# Altium PCB 宁波2号线PIS_数字功率放大器_网络音频(BHC-A-2030-02)_PCB(06001537)_V1.0.PcbDoc (part 6 of 7)
Units mm, origin at the board's own origin, x right, y up, seen from the top; angles counter-clockwise.
Board outline 86 x 96 mm, 4 copper layers (Top Layer, GND, VDD, Bottom Layer); 204 components, 185 nets, 781 pads, 267 vias.
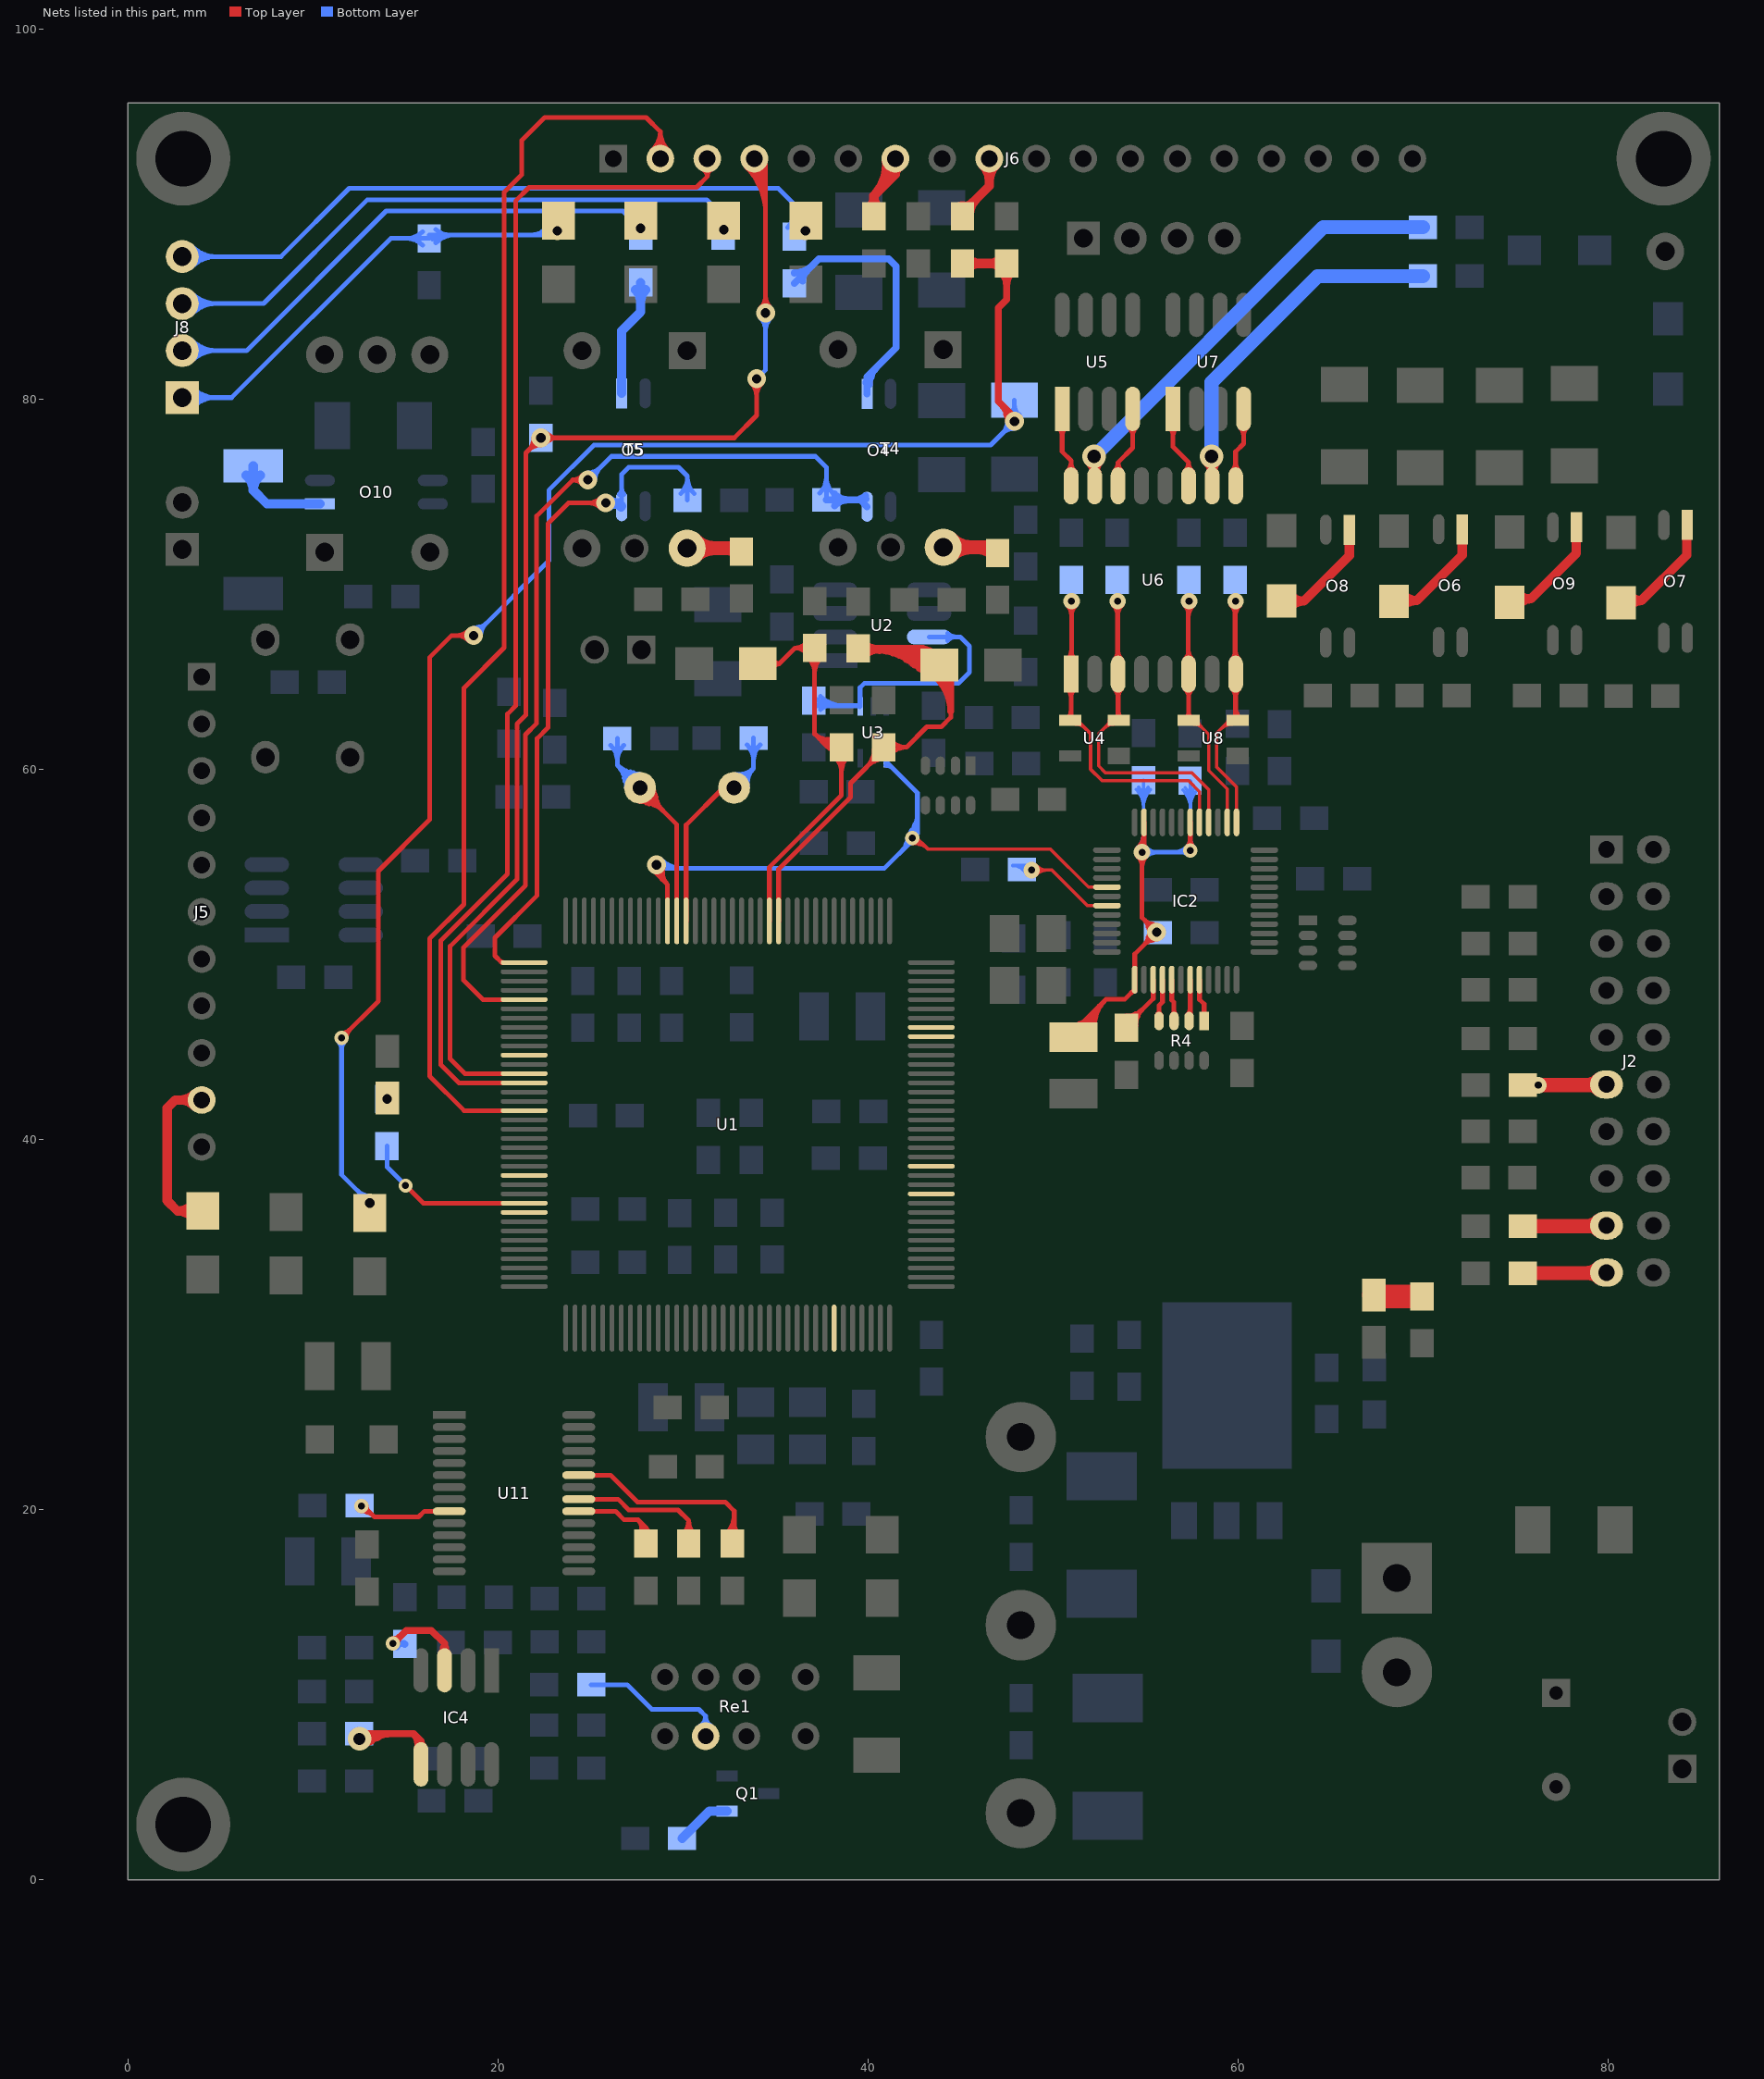
[diagram p8: the nets of this part, all layers, seen from the top]

## Via types
v1: diameter 1.016, hole 0.508, Top Layer to Bottom Layer, 122 vias
v2: diameter 0.762, hole 0.381, Top Layer to Bottom Layer, 48 vias
v3: diameter 0.889, hole 0.381, Top Layer to Bottom Layer, 37 vias
v4: diameter 1.27, hole 0.635, Top Layer to Bottom Layer, 28 vias
v5: diameter 1.27, hole 0.711, Top Layer to Bottom Layer, 20 vias
v6: diameter 0.762, hole 0.457, Top Layer to Bottom Layer, 11 vias
v7: diameter 1.143, hole 0.635, Top Layer to Bottom Layer, 1 vias

## Nets (pads, with @x,y where several pads share a name; then routed paths per layer and width w, separated by ;. In a path a pad name is that pad's centre, name@x,y a point inside that pad or via, vN(x,y) a via of type N, cw(c..) or ccw(c..) an arc to the next point about the centre after c; other vN are vias at no path point) (continued)
NetIC2_31: IC2.31 R20.1 | length 12.8
  Top Layer w0.178: v3(48.844,54.559) 49.936,54.559 51.856,52.64 IC2.31@52.917,52.64 ; 49.703,54.559 cw(c49.703,55.418) 49.096,54.811 ccw(c49.703,55.418) 49.703,54.559 ; 49.703,54.559 ccw(c49.703,53.701) 49.096,54.308 cw(c49.703,53.701) 49.703,54.559
  Bottom Layer w0.178: R20.1@47.82,54.804 cw(c47.82,53.985) 48.534,54.385 ccw(c47.82,53.985) R20.1@47.82,54.804 ; R20.1@47.82,54.804 48.6,54.804 v3(48.844,54.559) ; v3(48.844,54.559) ccw(c48.427,54.325) 48.427,54.804 cw(c48.427,54.325) v3(48.844,54.559) ; R20.1@48.123,54.804 cw(c48.123,54.155) 48.689,54.472 ccw(c48.123,54.155) R20.1@48.123,54.804
NetIC2_39: IC2.39 R8.2 | length 8.9
  Top Layer w0.254: 54.598,46.839 ccw(c54.828,45.983) R8.2@53.959,46.16 ; 54.639,46.801 cw(c53.78,47.031) R8.2@53.959,46.16 ; IC2.39@55.417,48.64 55.417,47.619 R8.2@53.959,46.161 ; R8.2@53.959,46.668 ccw(c53.959,47.892) 54.824,47.026 cw(c53.959,47.892) R8.2@53.959,46.668 ; R8.2@54.467,46.16 cw(c55.696,46.16) 54.827,47.029 ccw(c55.696,46.16) R8.2@54.467,46.16
NetIC2_40: IC2.40 R4.4 | length 3.3
  Top Layer w0.254: R4.4@55.728,46.406 55.728,47.244 55.917,47.434 IC2.40@55.917,48.64 ; 55.728,46.958 cw(c55.421,46.958) 55.638,46.742 ccw(c55.421,46.958) 55.728,46.958 ; 55.728,46.958 ccw(c56.034,46.958) 55.817,46.742 cw(c56.034,46.958) 55.728,46.958
NetIC2_41: IC2.41 R4.3 | length 3.2
  Top Layer w0.254: IC2.41@56.417,48.64 56.417,47.545 56.54,47.422 R4.3@56.54,46.406 ; 56.54,46.958 cw(c56.234,46.958) 56.451,46.742 ccw(c56.234,46.958) 56.54,46.958 ; 56.54,46.958 ccw(c56.847,46.958) 56.63,46.742 cw(c56.847,46.958) 56.54,46.958
NetIC2_43: IC2.43 R4.2 | length 3.1
  Top Layer w0.254: R4.2@57.353,46.406 57.417,46.47 IC2.43@57.417,48.64 ; R4.2@57.263,46.742 ccw(c56.892,47.113) 57.417,47.113 cw(c56.892,47.113) R4.2@57.263,46.742
NetIC2_44: IC2.44 R4.1 | length 3.3
  Top Layer w0.254: IC2.44@57.917,48.64 57.917,47.569 58.166,47.32 R4.1@58.166,46.406 ; 58.166,46.958 cw(c57.859,46.958) 58.076,46.742 ccw(c57.859,46.958) 58.166,46.958 ; 58.166,46.958 ccw(c58.473,46.958) 58.256,46.742 cw(c58.473,46.958) 58.166,46.958
NetIC4_3: IC4.3 R76.2 | length 12.3
  Top Layer w0.381: v2(14.326,12.776) 14.351,12.776 15.062,13.487 16.408,13.487 17.12,12.776 17.12,12.548 ; 17.12,12.548 cw(c16.805,12.548) 16.994,12.296 ccw(c16.805,12.548) 17.12,12.548 ; 17.12,12.548 ccw(c17.434,12.548) 17.245,12.296 cw(c17.434,12.548) 17.12,12.548 ; 17.12,12.634 cw(c16.614,12.634) 16.971,12.277 ccw(c16.614,12.634) 17.12,12.634 ; 17.12,12.634 ccw(c17.625,12.634) 17.268,12.277 cw(c17.625,12.634) 17.12,12.634 ; v2@14.326,12.967 ccw(c14.326,13.488) 14.694,13.119 cw(c14.326,13.488) v2@14.326,12.967 ; v2@14.516,12.776 cw(c14.915,12.776) 14.633,13.058 ccw(c14.915,12.776) v2@14.516,12.776
  Top Layer w0.508: IC4.3@17.12,11.328 17.12,12.548
  Bottom Layer w0.381: R76.2@14.97,12.743 14.936,12.776 v2(14.326,12.776) ; v2(14.326,12.776) cw(c14.326,12.547) 14.545,12.614 ccw(c14.326,12.547) v2(14.326,12.776) ; v2(14.326,12.776) ccw(c14.326,13.042) 14.567,12.93 cw(c14.326,13.042) v2(14.326,12.776) ; R76.2@14.786,12.776 cw(c14.786,13.236) 14.46,12.911 ccw(c14.786,13.236) R76.2@14.786,12.776 ; R76.2@14.786,12.776 ccw(c14.786,12.316) 14.46,12.641 cw(c14.786,12.316) R76.2@14.786,12.776
NetIC4_5: IC4.5 R105.2 | length 14.1
  Top Layer w0.381: v4@12.576,7.654 ccw(c12.958,7.9) 13.184,7.507 ; v4@12.896,7.86 ccw(c13.294,8.116) 13.531,7.706 ; v4@12.929,7.899 15.443,7.899 ; IC4.5@15.85,6.248 15.85,7.493 ; 15.443,7.899 cw(c14.873,7.329) 15.648,7.106 ccw(c14.873,7.329) 15.443,7.899 ; 15.443,7.899 15.85,7.493 ; 15.85,7.493 cw(c15.483,7.493) 15.716,7.21 ccw(c15.483,7.493) 15.85,7.493 ; 15.85,7.493 ccw(c16.217,7.493) 15.983,7.21 cw(c16.217,7.493) 15.85,7.493 ; v4@12.567,7.575 cw(c13.35,6.792) 13.35,7.899 ccw(c13.35,6.792) v4@12.567,7.575 ; v4@12.837,7.306 cw(c14.27,5.872) 14.27,7.899 ccw(c14.27,5.872) v4@12.837,7.306
  Bottom Layer w0.381: R105.2@12.514,7.899 R105.2@12.929,7.899
  other v4: 12.522,7.62
NetJ2_11: J2.11 R30.2 | length 7.4
  Top Layer w0.762: R30.2@75.379,42.946 79.877,42.946 J2.11@79.908,42.977 ; 78.786,42.946 ccw(c78.786,43.972) 79.512,43.246 cw(c78.786,43.972) 78.786,42.946 ; 78.937,42.946 cw(c78.937,42.132) 79.512,42.707 ccw(c78.937,42.132) 78.937,42.946
  other v3: 76.225,42.936
NetJ2_17: J2.17 R31.2 | length 7.4
  Top Layer w0.508: R31.2@75.379,35.322 R31.2@75.414,35.357
  Top Layer w0.762: R31.2@75.379,35.326 J2.17@79.877,35.326 ; 78.786,35.326 ccw(c78.786,36.352) 79.512,35.626 cw(c78.786,36.352) 78.786,35.326 ; 78.937,35.326 cw(c78.937,34.512) 79.512,35.087 ccw(c78.937,34.512) 78.937,35.326
NetJ2_19: J2.19 R28.2 | length 7.4
  Top Layer w0.508: R28.2@75.379,32.782 R28.2@75.414,32.817
  Top Layer w0.762: R28.2@75.379,32.786 J2.19@79.877,32.786 ; 78.786,32.786 ccw(c78.786,33.812) 79.512,33.086 cw(c78.786,33.812) 78.786,32.786 ; 78.937,32.786 cw(c78.937,31.972) 79.512,32.547 ccw(c78.937,31.972) 78.937,32.786
NetJ6_7: J6.7 R49.1 | length 9.6
  Top Layer w0.508: R49.1@40.056,90.271 ccw(c39.406,90.921) 40.326,90.921 ccw(c41.246,90.921) R49.1@40.595,90.271 ; R49.1@40.326,89.874 40.326,90.999 ; J6.7@40.988,92.937 cw(c38.682,92.643) 40.326,90.999 ; 41.058,91.731 ccw(c39.98,92.808) J6.7@41.492,93.001 ; J6.7@41.237,92.567 cw(c41.005,92.153) 41.48,92.153 ; J6.7@41.48,93 41.48,92.153 ; J6.7@41.723,92.567 ccw(c41.955,92.153) 41.48,92.153 ; 40.326,90.999 41.48,92.153
NetJ6_9: J6.9 R37.1 | length 7.1
  Top Layer w0.508: R37.1@45.106,90.064 46.56,91.518 J6.9@46.56,93 ; R37.1@45.106,90.382 ccw(c45.106,91.15) R37.1@45.649,90.607 ; R37.1@45.487,90.001 cw(c46.56,90.001) 45.801,90.759 ; J6.9@46.209,92.649 cw(c45.363,91.802) 46.56,91.802 cw(c47.757,91.802) J6.9@46.911,92.649
  Top Layer w1.27: R37.1@45.106,89.874 R37.1@45.106,90.064
NetLED1_2: LED1.2 R59.2
  other v1: 14.011,42.198
NetLED2_2: LED2.2 R1.2 | length 2.6
  Top Layer w1.27: LED2.2@67.335,31.598 67.403,31.53 R1.2@69.936,31.53
NetO4_1: O4.1 R11.1 | length 17.9
  Bottom Layer w0.381: R11.1@36.023,86.253 37.35,87.579 41.123,87.579 41.529,87.173 41.529,82.779 39.954,81.204 O4.1@39.954,80.289 ; R11.1@36.023,86.824 ccw(c36.023,88.204) 36.999,87.228 ; R11.1@36.468,86.38 cw(c37.234,86.38) 36.692,86.922 ; O4.1@39.897,80.896 ccw(c39.571,81.462) 40.201,81.293 ; O4.1@40.069,80.797 cw(c41.326,80.797) 40.437,81.686 ccw(c41.326,80.797) O4.1@40.069,80.797
NetO5_1: O5.1 R33.1 | length 7.9
  Bottom Layer w0.508: O5.1@26.695,80.315 26.695,83.693 27.717,84.715 R33.1@27.717,86.303 ; R33.1@27.448,85.907 cw(c26.797,85.256) 27.717,85.256 cw(c28.637,85.256) R33.1@27.987,85.907
NetO6_1: O6.1 R57.1 | length 9.7
  Top Layer w0.508: R57.1@68.453,69.118 69.652,69.118 ; O6.1@72.111,72.974 72.111,71.577 69.652,69.118 ; 69.652,69.118 cw(c69.652,70.129) 68.857,69.505 ccw(c69.652,70.129) 69.652,69.118 ; R57.1@68.814,68.782 cw(c69.627,67.968) 69.627,69.118 ccw(c69.627,67.968) R57.1@68.814,68.782
NetO7_1: O7.1 R58.1 | length 9.1
  Top Layer w0.508: R58.1@80.594,69.118 81.793,69.118 ; O7.1@84.252,72.974 84.252,71.577 81.793,69.118 ; 81.793,69.118 cw(c81.793,69.992) 81.118,69.438 ccw(c81.793,69.992) 81.793,69.118 ; 81.793,69.118 ccw(c81.793,68.328) 81.144,68.779 cw(c81.793,68.328) 81.793,69.118
NetO8_1: O8.1 R63.1 | length 9.6
  Top Layer w0.508: R63.1@62.357,69.093 63.556,69.093 ; O8.1@66.015,72.949 66.015,71.552 63.556,69.093 ; 63.556,69.093 cw(c63.556,70.136) 62.769,69.451 ccw(c63.556,70.136) 63.556,69.093 ; 63.556,69.093 ccw(c63.556,68.05) 62.769,68.735 cw(c63.556,68.05) 63.556,69.093
NetO9_1: O9.1 R64.1 | length 9.2
  Top Layer w0.508: R64.1@74.625,69.22 75.824,69.22 ; O9.1@78.283,73.076 78.283,71.679 75.824,69.22 ; 75.824,69.22 ccw(c75.824,68.426) 75.144,68.835 cw(c75.824,68.426) 75.824,69.22 ; R64.1@75.062,69.503 ccw(c75.745,70.186) 75.745,69.22 cw(c75.745,70.186) R64.1@75.062,69.503
NetO10_1: O10.1 R98.1 | length 7.1
  Bottom Layer w0.508: R98.1@6.387,75.888 cw(c5.764,75.082) 6.782,75.082 ; R98.1@6.782,76.399 6.782,75.082 ; R98.1@7.177,75.888 ccw(c7.8,75.082) 6.782,75.082 ; O10.1@10.389,74.346 7.518,74.346 6.782,75.082
NetQ1_1: Q1.1 R6.2 | length 3
  Bottom Layer w0.508: R6.2@29.955,2.245 31.434,3.724 Q1.1@32.378,3.724
NetR5_1: R5.1 T4.3 | length 9.7
  Top Layer w0.762: T4.3@44.069,71.997 46.705,71.997 R5.1@47.006,71.696 ; 45.563,71.997 cw(c45.563,73.491) 44.507,72.435 ccw(c45.563,73.491) 45.563,71.997 ; 45.563,71.997 ccw(c45.563,70.503) 44.507,71.559 cw(c45.563,70.503) 45.563,71.997 ; 45.973,71.997 cw(c45.973,70.79) 46.826,71.643 ccw(c45.973,70.79) 45.973,71.997
NetR23_1: R23.1 T5.3 | length 8.9
  Top Layer w0.762: T5.3@30.226,71.946 32.989,71.946 R23.1@33.163,71.772 ; 31.72,71.946 cw(c31.72,73.441) 30.664,72.384 ccw(c31.72,73.441) 31.72,71.946 ; 31.72,71.946 ccw(c31.72,70.452) 30.664,71.509 cw(c31.72,70.452) 31.72,71.946 ; 32.436,71.946 cw(c32.436,71.172) 32.983,71.72 ccw(c32.436,71.172) 32.436,71.946
NetR43_1: R43.1 U2.7 U3.1 | length 21.4
  Bottom Layer w0.254: R43.1@37.119,63.441 39.531,63.441 U3.1@39.573,63.398 39.573,64.414 39.802,64.643 44.882,64.643 45.491,65.253 45.491,66.65 44.983,67.158 U2.7@43.307,67.158 ; 39.415,63.441 cw(c39.415,63.24) U3.1@39.557,63.382 ; 44.766,67.158 cw(c44.766,67.817) 44.3,67.351 ccw(c44.766,67.817) 44.766,67.158 ; 44.766,67.158 ccw(c44.766,66.499) 44.3,66.965 cw(c44.766,66.499) 44.766,67.158 ; R43.1@37.248,63.773 ccw(c38.049,64.575) 38.049,63.441 cw(c38.049,64.575) R43.1@37.248,63.773 ; R43.1@37.427,63.234 cw(c37.926,62.735) 37.926,63.441 ccw(c37.926,62.735) R43.1@37.427,63.234 ; R43.1@37.427,63.953 ccw(c38.662,65.188) 38.662,63.441 cw(c38.662,65.188) R43.1@37.427,63.953
NetR53_1: R53.1 U6.15 | length 33.6
  Top Layer w0.254: U6.15@52.084,76.141 ccw(c51.908,76.375) v5@52.19,76.451 ; v5@52.195,76.404 cw(c52.182,76.165) 52.421,76.165 cw(c52.967,76.165) v5@52.581,76.552 ; U6.15@52.201,76.192 ccw(c52.155,76.464) 52.421,76.393 ccw(c52.795,76.292) U6.15@52.474,76.076 ; v5@52.206,76.392 ccw(c52.575,76.491) U6.15@52.384,76.16 ; v5(52.222,76.911) 52.248,76.886 U6.15@52.248,75.323 ; v5@52.248,76.582 cw(c51.589,76.582) 52.055,76.116 ccw(c51.589,76.582) v5@52.248,76.582 ; v5@52.248,76.582 ccw(c52.907,76.582) 52.441,76.116 cw(c52.907,76.582) v5@52.248,76.582 ; v5@52.582,76.552 ccw(c53.388,75.746) 52.248,75.746 cw(c53.388,75.746) v5@52.582,76.552 ; v5@51.863,76.552 cw(c50.935,75.623) 52.248,75.623 ccw(c50.935,75.623) v5@51.863,76.552 ; v5@52.043,76.732 cw(c51.548,76.237) 52.248,76.237 ccw(c51.548,76.237) v5@52.043,76.732
  Bottom Layer w0.762: v5(52.222,76.911) 64.602,89.29 R53.1@69.985,89.29
NetR54_1: R54.1 U6.10 | length 28.5
  Top Layer w0.254: U6.10@58.434,76.141 ccw(c58.258,76.375) v5@58.54,76.451 ; v5@58.545,76.404 cw(c58.532,76.165) 58.771,76.165 cw(c59.317,76.165) v5@58.931,76.552 ; U6.10@58.551,76.192 ccw(c58.505,76.464) 58.771,76.393 ccw(c59.145,76.292) U6.10@58.824,76.076 ; v5@58.556,76.392 ccw(c58.925,76.491) U6.10@58.734,76.16 ; U6.10@58.598,75.323 v5@58.598,76.886 ; v5@58.598,76.582 cw(c57.939,76.582) 58.405,76.116 ccw(c57.939,76.582) v5@58.598,76.582 ; v5@58.598,76.582 ccw(c59.257,76.582) 58.791,76.116 cw(c59.257,76.582) v5@58.598,76.582 ; v5@58.932,76.552 ccw(c59.738,75.746) 58.598,75.746 cw(c59.738,75.746) v5@58.932,76.552 ; v5@58.213,76.552 cw(c57.285,75.623) 58.598,75.623 ccw(c57.285,75.623) v5@58.213,76.552 ; v5@58.393,76.732 cw(c57.898,76.237) 58.598,76.237 ccw(c57.898,76.237) v5@58.393,76.732
  Bottom Layer w0.762: v5(58.572,76.911) 58.572,80.924 64.297,86.649 R54.1@69.985,86.649
NetR75_2: R75.2 Re1.6 | length 9.3
  Bottom Layer w0.254: R75.2@25.053,10.55 26.991,10.55 28.321,9.22 30.861,9.22 31.227,8.854 ; Re1.6@30.914,8.312 ccw(c30.599,8.854) 31.227,8.854 ; Re1.6@31.227,7.773 31.227,8.854 ; Re1.6@31.539,8.312 cw(c31.854,8.854) 31.227,8.854
NetR83_2: R83.2 U11.21 | length 11
  Top Layer w0.254: U11.21@24.374,20.571 26.496,20.571 27.076,19.99 29.743,19.99 30.312,19.422 ; R83.2@30.312,18.169 30.312,19.422 ; 30.312,19.422 cw(c29.319,19.422) 29.976,18.677 ccw(c29.319,19.422) 30.312,19.422 ; 30.312,19.422 ccw(c31.304,19.422) 30.648,18.677 cw(c31.304,19.422) 30.312,19.422
NetR85_2: R85.2 U11.9 | length 7.5
  Top Layer w0.254: v2(12.632,20.202) ccw(c13.162,20.388) 13.017,19.845 ; v2@12.776,20.168 13.335,19.609 15.723,19.609 16.034,19.921 U11.9@17.374,19.921 ; v2@12.632,19.948 cw(c12.632,19.071) 13.252,19.691 ccw(c12.632,19.071) v2@12.632,19.948 ; v2@12.886,20.202 ccw(c13.235,20.202) 12.988,19.956 cw(c13.235,20.202) v2@12.886,20.202
  Bottom Layer w0.254: R85.2@12.741,20.202 R85.2@12.776,20.168
NetR89_2: R89.2 U11.20 | length 11.5
  Top Layer w0.254: U11.20@24.374,19.921 26.358,19.921 26.822,19.456 27.584,19.456 ; R89.2@28,18.169 28,19.041 ; 27.584,19.456 cw(c27.153,19.025) 27.615,18.628 ccw(c27.153,19.025) 27.584,19.456 ; 27.584,19.456 28,19.041 ; 28,19.041 cw(c27.709,19.041) 27.815,18.769 ccw(c27.709,19.041) 28,19.041 ; 28,19.041 ccw(c28.292,19.041) 28.185,18.769 cw(c28.292,19.041) 28,19.041 ; 27.778,19.263 cw(c27.361,18.846) 27.808,18.462 ccw(c27.361,18.846) 27.778,19.263 ; 27.971,19.069 cw(c27.569,18.667) 28,18.296 ccw(c27.569,18.667) 27.971,19.069
NetR94_2: R94.2 U11.23 | length 15.6
  Top Layer w0.254: U11.23@24.374,21.871 26.085,21.871 27.534,20.422 32.283,20.422 32.775,19.93 32.775,18.931 ; R94.2@32.315,18.655 ccw(c31.202,19.768) 32.775,19.768 cw(c31.202,19.768) R94.2@32.315,18.655 ; R94.2@32.494,18.476 ccw(c31.815,19.155) 32.775,19.155 cw(c31.815,19.155) R94.2@32.494,18.476 ; 32.775,19.277 ccw(c33.655,19.277) 33.033,18.655 cw(c33.655,19.277) 32.775,19.277
NOISE1_CPU: O4.4 R10.2 U1.41 | length 66.8
  Top Layer w0.254: U1.41@21.423,47.566 19.185,47.566 18.136,48.616 18.136,50.368 21.488,53.721 21.488,61.874 22.098,62.484 22.098,73.685 24.054,75.641 ; v1(24.867,75.641) 24.054,75.641 ; 24.054,75.641 cw(c24.054,74.965) 24.574,75.397 ccw(c24.054,74.965) 24.054,75.641 ; 24.054,75.641 ccw(c24.054,76.318) 24.574,75.885 cw(c24.054,76.318) 24.054,75.641
  Bottom Layer w0.254: v1(24.867,75.641) 26.137,76.911 37.16,76.911 37.753,76.319 R10.2@37.753,74.558 ; 25.517,76.292 cw(c24.867,76.942) 24.867,76.022 ccw(c24.867,76.942) 25.517,76.292 ; 25.517,76.292 ccw(c26.167,75.641) 25.248,75.641 cw(c26.167,75.641) 25.517,76.292 ; 37.753,75.785 cw(c36.526,75.785) 37.393,74.918 ccw(c36.526,75.785) 37.753,75.785 ; 37.753,75.785 ccw(c38.979,75.785) 38.112,74.918 cw(c38.979,75.785) 37.753,75.785
  Bottom Layer w0.381: R10.2@37.753,74.558 39.589,74.558 ; 39.586,74.616 cw(c39.73,74.366) O4.4@39.891,74.606 ; 39.597,74.561 ccw(c39.487,74.971) O4.4@39.855,74.759 ; O4.4@39.954,74.193 39.589,74.558 ; 38.953,74.558 cw(c38.953,75.632) 38.194,74.873 ccw(c38.953,75.632) 38.953,74.558 ; 38.953,74.558 ccw(c38.953,73.485) 38.194,74.244 cw(c38.953,73.485) 38.953,74.558 ; 39.589,74.558 ccw(c39.589,74.832) 39.847,74.74 cw(c39.589,74.832) 39.589,74.558 ; 39.333,74.558 ccw(c39.333,75.323) 39.873,74.782 cw(c39.333,75.323) 39.333,74.558
NOISE1_CPU_ADC: C10.1 R7.1 R9.1 U1.13 | length 80.4
  Top Layer w0.254: U1.13@35.173,51.816 35.173,54.603 39.065,58.495 39.065,59.258 40.853,61.046 R9.1@40.853,61.197 ; 40.169,60.415 cw(c41.05,60.179) 40.853,61.07 cw(c40.003,61.229) 40.227,60.394 ; R9.1@41.212,60.838 cw(c42.079,59.97) 42.079,61.197 ; R9.1@41.212,61.556 ccw(c42.079,62.423) 42.079,61.197 ; 44.475,63.195 44.475,62.814 43.967,62.306 43.188,62.306 42.079,61.197 ; 39.968,60.161 ccw(c39.06,61.07) 40.345,61.07 cw(c39.06,61.07) 39.968,60.161 ; 40.027,60.22 cw(c40.853,59.394) 40.853,60.562 ccw(c40.853,59.394) 40.027,60.22 ; R9.1@40.402,60.595 ccw(c39.927,61.07) 40.599,61.07 cw(c39.927,61.07) R9.1@40.402,60.595
  Top Layer w0.381: R7.1@39.481,66.531 42.968,66.531 ; 41.953,66.312 ccw(c42.733,67.664) C10.1@43.424,66.265 ; 42.076,65.954 ccw(c42.562,66.653) C10.1@43.206,66.096 ; 42.424,65.712 ccw(c42.884,66.374) C10.1@43.494,65.846 ; 42.57,65.956 ccw(c43.112,66.896) C10.1@43.593,65.923 ; 42.761,65.846 cw(c42.441,65.292) C10.1@43.059,65.457 ; 42.771,65.47 ccw(c43.206,66.095) C10.1@43.782,65.597 ; C10.1@43.04,65.556 ccw(c41.853,65.414) 42.45,66.45 ccw(c43.164,67.685) C10.1@43.546,66.311 ; C10.1@43.878,64.948 cw(c43.778,64.32) 44.294,64.693 ; 44.475,63.195 44.475,65.023 C10.1@43.861,65.638 42.968,66.531 ; 40.554,66.531 cw(c40.554,67.604) 39.795,66.845 ccw(c40.554,67.604) 40.554,66.531 ; 40.554,66.531 ccw(c40.554,65.458) 39.795,66.217 cw(c40.554,65.458) 40.554,66.531 ; 42.968,66.531 cw(c42.567,66.129) 43.09,65.909 ccw(c42.567,66.129) 42.968,66.531 ; 42.968,66.531 ccw(c43.488,67.051) 43.614,66.326 cw(c43.488,67.051) 42.968,66.531 ; R7.1@39.82,66.117 cw(c40.502,65.54) 40.63,66.423 ccw(c40.502,65.54) R7.1@39.82,66.117 ; R7.1@39.837,66.669 ccw(c40.191,66.933) 40.128,66.497 cw(c40.191,66.933) R7.1@39.837,66.669 ; R7.1@39.892,66.531 cw(c39.892,61.797) 43.24,65.144 ccw(c39.892,61.797) R7.1@39.892,66.531 ; 40.812,66.531 cw(c40.812,62.717) 43.509,65.414 ccw(c40.812,62.717) 40.812,66.531 ; 41.732,66.531 cw(c41.732,63.637) 43.778,65.683 ccw(c41.732,63.637) 41.732,66.531 ; 42.652,66.531 cw(c42.652,64.556) 44.048,65.953 ccw(c42.652,64.556) 42.652,66.531 ; C10.1@43.547,65.096 cw(c41.965,63.147) 44.475,63.147 ccw(c41.965,63.147) C10.1@43.547,65.096 ; C10.1@43.787,65.392 cw(c42.615,63.947) 44.475,63.947 ccw(c42.615,63.947) C10.1@43.787,65.392 ; C10.1@44.028,65.688 cw(c43.264,64.747) 44.475,64.747 ccw(c43.264,64.747) C10.1@44.028,65.688
NOISE1A: C12.1 J8.1 R19.1 | length 39.2
  Bottom Layer w0.254: J8.1@2.946,80.086 5.613,80.086 14.216,88.689 R19.1@16.291,88.689 ; J8.1@3.306,79.727 cw(c4.173,78.86) 4.173,80.086 cw(c4.173,81.313) J8.1@3.306,80.445 ; J8.1@3.485,79.547 cw(c4.786,78.247) 4.786,80.086 cw(c4.786,81.926) J8.1@3.485,80.625 ; R19.1@15.932,88.329 ccw(c15.064,87.462) 15.064,88.689 ccw(c15.064,89.915) R19.1@15.932,89.048 ; R19.1@16.291,88.878 v1@23.317,88.878 ; R19.1@16.47,88.636 cw(c17.054,88.052) 17.054,88.878 ; R19.1@16.65,88.456 cw(c17.667,87.439) 17.667,88.878 ; R19.1@16.65,89.175 ccw(c17.367,89.892) 17.367,88.878 ; 22.373,89.041 cw(c22.563,88.712) v1@22.889,88.908 ; 22.596,89.17 cw(c22.784,88.845) v1@23.107,89.038 ; v1@22.838,89.15 cw(c22.569,89.184) 22.704,88.95 cw(c22.774,88.83) v1@22.892,88.903 ; 21.751,88.878 ccw(c21.751,90.568) 22.946,89.373 cw(c21.751,90.568) 21.751,88.878 ; 22.364,88.878 ccw(c22.364,89.954) 23.126,89.193 cw(c22.364,89.954) 22.364,88.878
  other v1: 23.216,89.103
NOISE1B: C14.1 J8.2 R33.2 | length 38.6
  Bottom Layer w0.254: J8.2@2.946,82.626 6.426,82.626 13.97,90.17 26.772,90.17 ; J8.2@3.306,82.267 cw(c4.173,81.4) 4.173,82.626 cw(c4.173,83.853) J8.2@3.306,82.985 ; J8.2@3.485,82.087 cw(c4.786,80.787) 4.786,82.626 cw(c4.786,84.466) J8.2@3.485,83.165 ; R33.2@27.122,89.449 ccw(c27.915,89.606) R33.2@27.53,88.895 ; 27.168,89.774 cw(c26.448,89.054) R33.2@27.464,88.987 ; R33.2@27.21,89.004 ccw(c25.705,89.103) 26.772,90.17 ; 27.284,89.658 ccw(c27.717,90.092) R33.2@27.717,89.478 ; R33.2@27.33,89.23 ccw(c26.411,89.23) 27.061,89.881 ccw(c27.711,90.531) v1@27.711,89.611 ; R33.2@27.788,89.103 27.788,88.914 R33.2@27.717,88.843 27.717,89.224 26.772,90.17
  other v1: 27.711,89.23
NOISE2_CPU: O5.4 R32.2 U1.37 | length 51.6
  Top Layer w0.254: v1(25.832,74.397) 23.825,74.397 22.708,73.279 22.708,62.255 22.123,61.671 22.123,53.188 19.837,50.902 19.837,49.936 U1.37@20.208,49.566 ; U1.37@20.208,49.566 U1.37@21.423,49.566 U1.37@20.208,49.566 ; 24.912,74.397 cw(c24.912,73.477) 25.562,74.127 ccw(c24.912,73.477) 24.912,74.397 ; 24.912,74.397 ccw(c24.912,75.316) 25.562,74.666 cw(c24.912,75.316) 24.912,74.397 ; 20.156,49.617 ccw(c20.28,49.741) 20.28,49.566 cw(c20.28,49.741) 20.156,49.617
  Bottom Layer w0.254: O5.4@26.695,74.219 26.695,75.946 27.076,76.327 29.769,76.327 30.243,75.853 R32.2@30.243,74.54 ; 26.695,75.156 cw(c26.266,75.156) 26.57,74.853 ccw(c26.266,75.156) 26.695,75.156 ; 26.695,75.156 ccw(c27.125,75.156) 26.821,74.853 cw(c27.125,75.156) 26.695,75.156 ; 30.243,75.766 cw(c29.017,75.766) 29.884,74.899 ccw(c29.017,75.766) 30.243,75.766 ; 30.243,75.766 ccw(c31.47,75.766) 30.602,74.899 cw(c31.47,75.766) 30.243,75.766
  Bottom Layer w0.508: v1(25.832,74.397) 26.518,74.397 O5.4@26.695,74.219 ; v1@26.023,74.229 cw(c26.283,73.999) 26.373,74.335 ; v1@26.023,74.229 cw(c26.283,73.999) 26.373,74.335 ; v1@26.023,74.229 cw(c26.283,73.999) 26.373,74.335 ; O5.4@26.445,74.397 cw(c26.445,75.01) 26.011,74.576 ccw(c26.445,75.01) O5.4@26.445,74.397 ; O5.4@26.445,74.397 ccw(c26.445,73.783) 26.011,74.217 cw(c26.445,73.783) O5.4@26.445,74.397 ; v1@26.144,74.397 cw(c26.144,73.667) 26.659,74.183 ccw(c26.144,73.667) v1@26.144,74.397
NOISE2_CPU_ADC: C19.1 R24.1 R25.1 U1.14 | length 43.5
  Top Layer w0.254: C19.1@34.041,65.705 35.2,65.705 ; U1.14@34.673,51.816 34.673,54.714 38.567,58.607 R24.1@38.567,61.197 37.838,61.197 ; 35.2,65.705 cw(c35.2,66.022) 34.897,65.929 ccw(c35.2,66.022) 35.2,65.705 ; 35.2,65.705 ccw(c35.2,65.388) 34.897,65.481 cw(c35.2,65.388) 35.2,65.705 ; 35.2,65.705 36.051,66.556 ; 36.051,66.556 cw(c36.051,65.688) 36.725,66.236 ccw(c36.051,65.688) 36.051,66.556 ; 36.051,66.556 ccw(c36.051,67.425) 36.725,66.877 cw(c36.051,67.425) 36.051,66.556 ; 36.051,66.556 R25.1@37.119,66.556 37.119,61.916 37.838,61.197 ; 37.119,65.203 cw(c38.345,65.203) 37.478,66.07 ccw(c38.345,65.203) 37.119,65.203 ; 37.119,65.203 ccw(c35.892,65.203) 36.76,66.07 cw(c35.892,65.203) 37.119,65.203 ; 37.838,61.197 cw(c37.838,60.928) 38.09,61.021 ccw(c37.838,60.928) 37.838,61.197 ; 37.838,61.197 ccw(c37.838,61.466) 38.09,61.373 cw(c37.838,61.466) 37.838,61.197 ; 38.567,59.843 cw(c39.793,59.843) 38.926,60.711 ccw(c39.793,59.843) 38.567,59.843 ; 38.567,59.843 ccw(c37.34,59.843) 38.207,60.711 cw(c37.34,59.843) 38.567,59.843 ; 37.119,61.916 ccw(c37.814,62.611) 38.31,61.762 cw(c37.814,62.611) 37.119,61.916 ; 37.352,61.683 ccw(c37.986,62.317) 38.438,61.543 cw(c37.986,62.317) 37.352,61.683 ; 37.584,61.45 ccw(c38.157,62.023) 38.567,61.324 cw(c38.157,62.023) 37.584,61.45 ; 37.817,61.218 ccw(c38.329,61.73) 38.695,61.105 cw(c38.329,61.73) 37.817,61.218
NOISE2A: C2.1 J8.3 R3.1 | length 40
  Bottom Layer w0.254: J8.3@2.946,85.166 7.341,85.166 12.954,90.78 31.293,90.78 32.181,89.891 ; J8.3@3.306,84.807 cw(c4.173,83.94) 4.173,85.166 cw(c4.173,86.393) J8.3@3.306,85.525 ; J8.3@3.485,84.627 cw(c4.786,83.327) 4.786,85.166 cw(c4.786,87.006) J8.3@3.485,85.705 ; R3.1@31.904,89.379 ccw(c31.57,89.891) 32.181,89.891 ; R3.1@31.97,89.452 ccw(c31.619,89.891) 32.181,89.891 ; R3.1@32.181,88.827 32.181,89.891 ; R3.1@32.41,89.476 cw(c32.671,89.891) 32.181,89.891 ; R3.1@32.458,89.379 cw(c32.792,89.891) 32.181,89.891
  other v1: 32.207,89.154
NOISE2B: C6.1 J8.4 R11.2 | length 49.1
  Bottom Layer w0.254: J8.4@2.946,87.706 8.28,87.706 11.963,91.389 35.154,91.389 36.023,90.52 ; J8.4@3.306,87.347 cw(c4.173,86.48) 4.173,87.706 cw(c4.173,88.933) J8.4@3.306,88.065 ; J8.4@3.485,87.167 cw(c4.786,85.867) 4.786,87.706 cw(c4.786,89.546) J8.4@3.485,88.245 ; R11.2@35.664,89.279 ccw(c34.797,90.146) 36.023,90.146 ccw(c37.25,90.146) R11.2@36.382,89.279 ; R11.2@36.023,88.793 36.023,90.52 ; R11.2@36.023,89.424 ccw(c36.746,89.424) R11.2@36.494,88.746 ; 36.023,89.789 ccw(c36.882,89.789) R11.2@36.583,88.984 ; 36.023,90.154 ccw(c37.017,90.154) v1@36.671,89.222 ; 36.029,89.89 ccw(c36.742,90.302) v1@36.663,89.482 ; 36.209,89.579 cw(c35.779,89.33) R11.2@36.259,89.202 ; v1@36.76,89.46 cw(c37.153,90.52) 36.023,90.52
  other v1: 36.627,89.103
OSCIN: C27.1 U1.23 X1.2 | length 22.5
  Top Layer w0.254: U1.23@30.173,51.816 30.173,56.996 32.182,59.004 X1.2@32.766,59.004
  Bottom Layer w0.254: X1.2@32.766,59.004 33.817,60.055 ; C27.1@33.817,61.695 33.817,60.055 ; 33.454,59.692 cw(c32.931,60.216) 32.831,59.482 ccw(c32.931,60.216) 33.454,59.692 ; 33.454,59.692 ccw(c33.978,59.169) 33.244,59.069 cw(c33.978,59.169) 33.454,59.692 ; 33.817,60.055 cw(c33.018,60.854) 32.865,59.734 ccw(c33.018,60.854) 33.817,60.055 ; 33.817,60.055 ccw(c34.615,59.256) 33.496,59.103 cw(c34.615,59.256) 33.817,60.055 ; 33.817,60.469 cw(c35.043,60.469) 34.176,61.336 ccw(c35.043,60.469) 33.817,60.469 ; 33.817,60.469 ccw(c32.59,60.469) 33.457,61.336 cw(c32.59,60.469) 33.817,60.469
OSCOUT: C29.1 U1.24 X1.1 | length 43.6
  Top Layer w0.254: X1.1@27.412,58.948 ccw(c28.452,59.161) 28.177,58.136 ; X1.1@27.661,58.999 ccw(c28.902,59.253) 28.574,58.03 ; X1.1@27.686,59.004 29.673,57.017 U1.24@29.673,51.816 ; X1.1@27.691,59.029 cw(c27.437,57.788) 28.661,58.116 ; X1.1@27.742,59.278 cw(c27.529,58.238) 28.554,58.513 ; 28.51,58.18 cw(c29.334,59.004) 28.169,59.004 ccw(c29.334,59.004) 28.51,58.18 ; 28.51,58.18 ccw(c27.686,57.356) 27.686,58.522 cw(c27.686,57.356) 28.51,58.18 ; 28.943,57.747 cw(c30.201,59.004) 28.423,59.004 ccw(c30.201,59.004) 28.943,57.747 ; 28.943,57.747 ccw(c27.686,56.489) 27.686,58.268 cw(c27.686,56.489) 28.943,57.747
  Bottom Layer w0.254: C29.1@26.458,61.672 26.458,60.233 ; 26.721,59.932 ccw(c27.987,60.249) X1.1@27.68,58.98 ; 26.758,59.97 cw(c26.442,58.703) X1.1@27.711,59.01 ; 26.822,59.524 ccw(c27.876,59.788) X1.1@27.62,58.733 ; 27.166,59.868 cw(c26.902,58.814) X1.1@27.958,59.07 ; X1.1@27.686,59.004 26.458,60.233 ; 26.458,60.233 cw(c25.27,59.045) 26.95,59.017 ccw(c25.27,59.045) 26.458,60.233 ; 26.458,60.233 ccw(c27.646,61.42) 27.674,59.741 cw(c27.646,61.42) 26.458,60.233 ; 26.458,60.446 cw(c27.684,60.446) 26.817,61.313 ccw(c27.684,60.446) 26.458,60.446 ; 26.458,60.446 ccw(c25.231,60.446) 26.098,61.313 cw(c25.231,60.446) 26.458,60.446 ; 26.881,59.809 cw(c26.103,59.031) 27.203,59.012 ccw(c26.103,59.031) 26.881,59.809 ; 26.881,59.809 ccw(c27.66,60.587) 27.678,59.487 cw(c27.66,60.587) 26.881,59.809
OUT1: C64.2 J5.10 | length 17
  Top Layer w0.508: J5.10@4,42.14 2.567,42.14 2.134,41.707 2.134,36.703 2.698,36.139 ; C64.2@4.059,36.139 2.698,36.139 ; 2.698,36.139 cw(c2.698,34.996) 3.573,35.731 ccw(c2.698,34.996) 2.698,36.139 ; 2.698,36.139 ccw(c2.698,37.282) 3.573,36.547 cw(c2.698,37.282) 2.698,36.139 ; 2.803,42.14 cw(c2.803,40.943) 3.649,41.789 ccw(c2.803,40.943) 2.803,42.14 ; 2.803,42.14 ccw(c2.803,43.337) 3.649,42.491 cw(c2.803,43.337) 2.803,42.14
OVP_CPU: J6.3 U1.50 | length 66.2
  Top Layer w0.254: U1.50@21.423,43.066 17.894,43.066 16.916,44.044 16.916,50.749 20.523,54.356 20.523,62.992 20.955,63.424 20.955,90.703 21.692,91.44 29.76,91.44 30.734,91.44 31.32,92.026 ; J6.3@31.059,92.434 cw(c30.87,92.026) 31.32,92.026 ; J6.3@31.32,93 31.32,92.026 ; J6.3@31.581,92.434 ccw(c31.77,92.026) 31.32,92.026
PFB: C15.1 C16.2 C17.2 C18.2 IC2.18 IC2.23 IC2.37 | length 81.8
  Top Layer w0.254: C15.1@50.876,45.593 52.857,47.574 ; C15.1@51.376,46.266 ccw(c51.376,46.684) 51.672,46.388 ; C15.1@51.477,45.941 ccw(c51.221,46.745) 52.038,46.534 ; C15.1@51.517,45.526 cw(c52.649,45.737) 51.835,46.552 ; C15.1@51.533,45.691 ccw(c50.895,47.018) 52.321,46.649 ; C15.1@51.541,45.594 cw(c53.11,45.608) 52.001,46.717 ; C15.1@51.643,45.462 ccw(c51.206,46.373) C15.1@52.184,46.12 ; C15.1@51.767,45.573 cw(c53.224,45.845) 52.176,46.893 ; C15.1@51.795,45.597 cw(c53.959,45.615) 52.429,47.146 ; C15.1@52.017,45.619 cw(c53.798,45.952) 52.517,47.233 ; C15.1@52.049,45.599 cw(c54.809,45.623) 52.857,47.574 ; 52.074,46.674 ccw(c53.083,46.413) C15.1@52.185,45.884 ; C15.1@52.266,45.666 cw(c54.372,46.059) 52.857,47.574 ; IC2.23@54.917,57.14 54.917,55.628 v3(54.813,55.524) 54.813,51.994 v1(55.601,51.206) 54.417,50.023 IC2.37@54.417,48.64 54.417,48.118 53.873,47.574 52.857,47.574 ; 55.144,50.925 cw(c55.688,50.779) v1@55.575,51.331 ; 55.144,51.488 ccw(c55.688,51.634) v1@55.575,51.082 ; 55.319,50.75 ccw(c55.173,51.294) v1@55.725,51.181 ; 55.319,51.663 cw(c55.173,51.119) v1@55.725,51.232 ; v2@57.328,55.524 v2(57.417,55.614) IC2.18@57.417,57.14 ; 54.813,54.758 cw(c55.58,54.758) 55.038,55.3 ccw(c55.58,54.758) 54.813,54.758 ; 54.813,54.758 ccw(c54.047,54.758) 54.589,55.3 cw(c54.047,54.758) 54.813,54.758 ; 54.95,50.556 cw(c55.601,49.906) 55.601,50.825 ccw(c55.601,49.906) 54.95,50.556 ; 54.95,50.556 ccw(c54.3,51.206) v1@55.22,51.206 ; 54.95,50.556 ccw(c54.3,51.206) v1@55.22,51.206 ; 54.95,51.857 cw(c54.3,51.206) v1@55.22,51.206 ; 54.95,51.857 ccw(c55.601,52.507) 55.601,51.587 cw(c55.601,52.507) 54.95,51.857 ; 54.95,51.857 cw(c54.3,51.206) v1@55.22,51.206 ; 57.417,56.227 cw(c56.804,56.227) 57.238,55.793 ccw(c56.804,56.227) 57.417,56.227 ; 57.417,56.227 ccw(c58.03,56.227) 57.597,55.793 cw(c58.03,56.227) 57.417,56.227 ; 54.244,47.945 cw(c54.417,47.772) 54.417,48.017 ccw(c54.417,47.772) 54.244,47.945 ; v3@54.589,55.749 ccw(c53.796,56.542) 54.917,56.542 cw(c53.796,56.542) v3@54.589,55.749 ; 54.917,56.04 ccw(c55.329,56.04) 55.038,55.749 cw(c55.329,56.04) 54.917,56.04
  Bottom Layer w0.178: v3(54.813,55.524) 54.891,55.602 C16.2@54.891,59.42 ; v2@57.328,55.524 57.429,55.626 57.429,59.37 C17.2@57.405,59.394 ; 54.891,57.974 cw(c56.209,57.974) 55.277,58.907 ccw(c56.209,57.974) 54.891,57.974 ; 54.891,57.974 ccw(c53.572,57.974) 54.504,58.907 cw(c53.572,57.974) 54.891,57.974 ; 54.891,58.404 cw(c55.78,58.404) 55.151,59.032 ccw(c55.78,58.404) 54.891,58.404 ; 54.891,58.404 ccw(c54.001,58.404) 54.63,59.032 cw(c54.001,58.404) 54.891,58.404 ; v3@54.562,55.776 ccw(c53.768,56.57) 54.891,56.57 cw(c53.768,56.57) v3@54.562,55.776 ; v3@54.687,55.65 ccw(c54.197,56.141) 54.891,56.141 cw(c54.197,56.141) v3@54.687,55.65 ; 54.891,56.196 ccw(c55.485,56.196) 55.065,55.776 cw(c55.485,56.196) 54.891,56.196 ; C17.2@57.019,58.881 cw(c56.028,57.891) 57.429,57.891 ccw(c56.028,57.891) C17.2@57.019,58.881 ; C17.2@57.145,59.007 cw(c56.458,58.32) 57.429,58.32 ccw(c56.458,58.32) C17.2@57.145,59.007 ; v2@57.211,55.82 ccw(c56.683,56.348) 57.429,56.348 cw(c56.683,56.348) v2@57.211,55.82 ; 57.429,56.29 ccw(c58.093,56.29) 57.624,55.82 cw(c58.093,56.29) 57.429,56.29 ; 57.429,58.007 cw(c58.665,58.007) 57.791,58.881 ccw(c58.665,58.007) 57.429,58.007 ; 57.429,58.437 cw(c58.236,58.437) 57.666,59.007 ccw(c58.236,58.437) 57.429,58.437
  Bottom Layer w0.254: v3(54.813,55.524) v2@57.328,55.524 ; 55.58,55.524 cw(c55.58,56.291) 55.038,55.749 ccw(c55.58,56.291) 55.58,55.524 ; 55.58,55.524 ccw(c55.58,54.758) 55.038,55.3 cw(c55.58,54.758) 55.58,55.524 ; 56.588,55.524 ccw(c56.588,56.443) 57.238,55.793 cw(c56.588,56.443) 56.588,55.524 ; 57.02,55.524 cw(c57.02,55.216) 57.238,55.434 ccw(c57.02,55.216) 57.02,55.524
RD_N: IC2.13 R47.2 U6.8 U8.2 | length 32.8
  Top Layer w0.178: 58.845,61.957 59.591,62.702 U8.2@59.868,62.702 ; 58.852,61.957 58.852,60.123 59.917,59.057 IC2.13@59.917,57.14 ; 59.262,62.331 ccw(c59.116,62.876) U8.2@59.639,62.664 ; U6.8@59.868,65.151 v3(59.868,69.088) ; 59.868,66.502 cw(c59.117,66.502) 59.648,65.971 ccw(c59.117,66.502) 59.868,66.502 ; 59.868,66.502 ccw(c60.619,66.502) 60.088,65.971 cw(c60.619,66.502) 59.868,66.502 ; 59.868,68.23 cw(c60.726,68.23) 60.119,68.837 ccw(c60.726,68.23) 59.868,68.23 ; 59.868,68.23 ccw(c59.009,68.23) 59.616,68.837 cw(c59.009,68.23) 59.868,68.23 ; 59.088,62.199 cw(c59.669,61.618) 59.669,62.44 ccw(c59.669,61.618) 59.088,62.199 ; U8.2@59.392,62.503 cw(c59.669,62.225) 59.669,62.618 ccw(c59.669,62.225) U8.2@59.392,62.503 ; U8.2@59.401,62.512 ccw(c59.261,62.651) 59.458,62.651 cw(c59.261,62.651) U8.2@59.401,62.512
  Top Layer w0.254: U6.8@59.842,65.176 v3@59.842,69.088 ; U6.8@59.868,65.151 59.868,62.753 U8.2@59.969,62.651 ; U8.2@59.881,62.8 ccw(c59.794,62.947) 59.942,63.033 ; 59.868,63.892 cw(c60.527,63.892) 60.061,64.358 ccw(c60.527,63.892) 59.868,63.892 ; 59.868,63.892 ccw(c59.209,63.892) 59.675,64.358 cw(c59.209,63.892) 59.868,63.892 ; v3@59.643,68.863 cw(c59.163,68.383) 59.842,68.383 ccw(c59.163,68.383) v3@59.643,68.863 ; U6.8@59.675,65.944 ccw(c59.27,66.349) 59.842,66.349 cw(c59.27,66.349) U6.8@59.675,65.944 ; 59.842,66.471 ccw(c60.588,66.471) 60.061,65.944 cw(c60.588,66.471) 59.842,66.471 ; 59.842,68.26 cw(c60.696,68.26) 60.092,68.863 ccw(c60.696,68.26) 59.842,68.26 ; 59.868,63.314 ccw(c60.632,63.314) 60.092,62.774 cw(c60.632,63.314) 59.868,63.314
RD_P: IC2.14 R46.2 U6.6 U8.3 | length 37.9
  Top Layer w0.178: v3(57.353,69.088) 57.353,65.176 U6.6@57.328,65.151 57.328,62.653 U8.3@57.329,62.651 57.656,62.651 58.42,61.887 58.42,59.944 59.417,58.947 IC2.14@59.417,57.14 ; 57.328,63.8 cw(c58.079,63.8) 57.548,64.331 ccw(c58.079,63.8) 57.328,63.8 ; 57.328,63.8 ccw(c56.577,63.8) 57.108,64.331 cw(c56.577,63.8) 57.328,63.8 ; 57.353,68.23 cw(c58.212,68.23) 57.605,68.837 ccw(c58.212,68.23) 57.353,68.23 ; 57.353,68.23 ccw(c56.495,68.23) 57.102,68.837 cw(c56.495,68.23) 57.353,68.23 ; U6.6@57.108,65.971 ccw(c56.515,66.563) 57.353,66.563 cw(c56.515,66.563) U6.6@57.108,65.971 ; U8.3@57.18,62.801 ccw(c56.824,63.157) 57.328,63.157 cw(c56.824,63.157) U8.3@57.18,62.801 ; 57.328,63.165 ccw(c57.843,63.165) 57.479,62.801 cw(c57.843,63.165) 57.328,63.165 ; 57.353,66.441 ccw(c58.018,66.441) 57.548,65.971 cw(c58.018,66.441) 57.353,66.441 ; U8.3@57.629,62.44 cw(c57.629,61.867) 58.035,62.272 ccw(c57.629,61.867) U8.3@57.629,62.44 ; U8.3@57.841,62.651 ccw(c58.287,62.651) 57.971,62.336 cw(c58.287,62.651) U8.3@57.841,62.651
  Top Layer w0.254: U6.6@57.302,65.176 v3@57.302,69.088 ; U6.6@57.328,65.151 57.329,65.149 U8.3@57.329,62.651 ; 57.329,63.069 cw(c56.912,63.069) 57.207,62.774 ccw(c56.912,63.069) 57.329,63.069 ; 57.329,63.069 ccw(c57.747,63.069) 57.452,62.774 cw(c57.747,63.069) 57.329,63.069 ; v3@57.129,68.863 cw(c56.709,68.444) 57.302,68.444 ccw(c56.709,68.444) v3@57.129,68.863 ; U6.6@57.135,64.358 cw(c56.665,63.888) 57.329,63.888 ccw(c56.665,63.888) U6.6@57.135,64.358 ; U6.6@57.135,65.944 ccw(c56.73,66.349) 57.302,66.349 cw(c56.73,66.349) U6.6@57.135,65.944 ; 57.302,66.471 ccw(c58.048,66.471) 57.521,65.944 cw(c58.048,66.471) 57.302,66.471 ; 57.302,68.199 cw(c58.242,68.199) 57.578,68.863 ccw(c58.242,68.199) 57.302,68.199 ; 57.329,63.896 cw(c57.983,63.896) 57.521,64.358 ccw(c57.983,63.896) 57.329,63.896
RST: IC2.29 U1.25 U3.4 | length 55.9
  Top Layer w0.178: v2@42.341,56.25 ccw(c43.002,56.717) 42.865,55.919 ; v2@42.499,56.327 ccw(c42.819,56.448) 42.761,56.111 ; v2@42.52,56.413 43.231,55.702 ; v2@42.561,56.048 cw(c42.751,55.78) 42.806,56.103 ; IC2.29@52.917,53.64 51.913,53.64 49.85,55.702 43.231,55.702 ; 43.231,55.702 ccw(c42.512,54.984) 42.419,55.996 cw(c42.512,54.984) 43.231,55.702 ; v2@42.403,56.173 cw(c42.467,55.475) 42.963,55.97 ccw(c42.467,55.475) v2@42.403,56.173
  Top Layer w0.254: v1@28.575,55.143 v1(28.575,54.839) 28.575,54.37 29.173,53.772 ; v1@28.668,54.925 cw(c27.97,54.281) 28.919,54.242 ; U1.25@29.173,51.816 29.173,53.772 ; 29.173,53.772 cw(c29.844,54.442) 28.939,54.725 ccw(c29.844,54.442) 29.173,53.772 ; v1@28.696,54.801 ccw(c29.391,54.584) 28.876,54.069 cw(c29.391,54.584) v1@28.696,54.801
  Bottom Layer w0.254: v1(28.575,54.839) 28.753,54.661 40.894,54.661 42.393,56.159 v2(42.393,56.286) ; U3.4@40.973,60.223 cw(c40.973,59.74) 41.315,60.082 ; U3.4@40.973,60.424 42.672,58.725 v2@42.672,56.54 ; 42.033,55.891 cw(c42.595,55.74) v2(42.393,56.286) ; 42.361,56.722 ccw(c42.697,56.528) v2(42.393,56.286) ; v2@42.368,56.539 ccw(c42.334,56.89) 42.639,56.714 ccw(c42.945,56.538) v2@42.624,56.392 ; 42.548,57.046 ccw(c43.013,56.777) v2@42.592,56.444 ; v2(42.393,56.286) ccw(c41.718,56.961) 42.672,56.961 cw(c41.718,56.961) v2(42.393,56.286) ; v1@28.665,54.928 ccw(c29.311,55.574) 29.311,54.661 cw(c29.311,55.574) v1@28.665,54.928 ; v1@28.844,54.569 cw(c29.066,54.348) 29.066,54.661 ccw(c29.066,54.348) v1@28.844,54.569 ; v1@28.844,55.108 ccw(c29.924,56.188) 29.924,54.661 cw(c29.924,56.188) v1@28.844,55.108 ; 41.869,55.636 ccw(c41.219,56.286) 42.139,56.286 cw(c41.219,56.286) 41.869,55.636 ; 42.176,55.943 cw(c42.393,55.726) 42.393,56.032 ccw(c42.393,55.726) 42.176,55.943 ; v2@42.213,56.466 ccw(c41.105,57.574) 42.672,57.574 cw(c41.105,57.574) v2@42.213,56.466
RUN_LED_CPU: R59.1 U1.63 | length 9.4
  Top Layer w0.254: v2(15.011,37.516) 15.961,36.566 U1.63@21.423,36.566
  Bottom Layer w0.254: R59.1@14.011,39.658 14.011,38.516 v2(15.011,37.516)
RX_N: U6.9 U7.4 | length 8.5
  Top Layer w0.254: U6.9@59.868,75.323 59.868,77.165 60.3,77.597 U7.4@60.3,79.477 ; 59.868,76.582 cw(c59.209,76.582) 59.675,76.116 ccw(c59.209,76.582) 59.868,76.582 ; 59.868,76.582 ccw(c60.527,76.582) 60.061,76.116 cw(c60.527,76.582) 59.868,76.582 ; 60.3,78.018 cw(c60.959,78.018) 60.493,78.484 ccw(c60.959,78.018) 60.3,78.018 ; 60.3,78.018 ccw(c59.641,78.018) 60.107,78.484 cw(c59.641,78.018) 60.3,78.018
RX_P: U6.11 U7.1 | length 8.6
  Top Layer w0.254: U7.1@56.49,79.477 56.49,77.419 57.328,76.581 ; U6.11@57.328,75.323 57.328,76.581 ; 56.49,78.018 cw(c57.149,78.018) 56.683,78.484 ccw(c57.149,78.018) 56.49,78.018 ; 56.49,78.018 ccw(c55.831,78.018) 56.297,78.484 cw(c55.831,78.018) 56.49,78.018 ; 57.328,76.581 cw(c56.672,76.581) 57.135,76.117 ccw(c56.672,76.581) 57.328,76.581 ; 57.328,76.581 ccw(c57.984,76.581) 57.521,76.117 cw(c57.984,76.581) 57.328,76.581
SHORT_CPU: J6.4 R38.2 U1.49 | length 83.6
  Top Layer w0.254: U1.49@21.423,43.566 18.212,43.566 17.424,44.353 17.424,50.444 21.031,54.051 21.031,62.459 21.514,62.941 21.514,75.362 21.514,77.097 v1(22.327,77.91) 32.774,77.91 33.985,79.121 v1(33.985,81.102) ; v1@21.946,77.91 cw(c21.026,77.91) 21.676,77.259 cw(c22.327,76.609) v1@22.327,77.529 ; v1@22.596,77.64 cw(c23.246,76.99) 23.246,77.91 cw(c23.246,78.829) v1@22.596,78.179 ; J6.4@33.419,92.559 cw(c30.889,90.028) 34.468,90.028 ; J6.4@33.599,92.739 cw(c31.502,90.642) 34.468,90.642 ; v1@33.716,80.833 cw(c33.065,80.182) 33.985,80.182 cw(c34.905,80.182) v1@34.255,80.833 ; J6.4@33.779,92.919 cw(c32.115,91.255) 34.468,91.255 ; J6.4@33.86,93 34.468,92.392 ; J6.4@33.958,93.098 cw(c32.728,91.868) 34.468,91.868 ; J6.4@34.138,93.278 cw(c33.341,92.481) 34.468,92.481 ; J6.4@34.142,92.444 cw(c34.269,92.193) 34.468,92.392 ; v1@34.198,84.928 ccw(c33.548,85.578) 34.468,85.578 ccw(c35.388,85.578) v1@34.737,84.928 ; J6.4@34.416,92.718 ccw(c34.667,92.591) 34.468,92.392 ; v1(34.468,84.658) 34.468,92.392
  Bottom Layer w0.254: v1(22.327,77.91) R38.2@22.336,77.919 ; v1(33.985,81.102) 34.468,81.585 v1(34.468,84.658) ; v1@34.198,84.389 cw(c33.548,83.738) 34.468,83.738 cw(c35.388,83.738) v1@34.737,84.389
TD_N: IC2.16 R45.2 U4.2 U6.3 | length 27.4
  Top Layer w0.178: 52.896,62.341 ccw(c52.769,62.817) U4.2@53.237,62.662 ; U6.3@53.492,65.176 U6.3@53.518,65.151 ; U4.2@53.518,62.702 53.241,62.702 52.464,61.925 52.464,60.185 52.832,59.817 57.507,59.817 58.417,58.906 IC2.16@58.417,57.14 ; U4.2@53.569,62.651 U4.2@53.569,62.702 ; 52.774,62.235 cw(c53.269,61.741) 53.269,62.44 ccw(c53.269,61.741) 52.774,62.235 ; 52.964,62.425 ccw(c52.738,62.651) 53.058,62.651 cw(c52.738,62.651) 52.964,62.425
  Top Layer w0.254: U6.3@53.492,65.176 v3(53.492,69.088) ; U4.2@53.518,62.702 U6.3@53.518,65.151 ; 53.492,68.321 cw(c54.259,68.321) 53.717,68.863 ccw(c54.259,68.321) 53.492,68.321 ; 53.492,68.321 ccw(c52.726,68.321) 53.268,68.863 cw(c52.726,68.321) 53.492,68.321 ; 53.518,63.892 cw(c54.177,63.892) 53.711,64.358 ccw(c54.177,63.892) 53.518,63.892 ; 53.518,63.892 ccw(c52.859,63.892) 53.325,64.358 cw(c52.859,63.892) 53.518,63.892 ; U6.3@53.325,65.944 ccw(c52.92,66.349) 53.492,66.349 cw(c52.92,66.349) U6.3@53.325,65.944 ; 53.492,66.471 ccw(c54.238,66.471) 53.711,65.944 cw(c54.238,66.471) 53.492,66.471 ; 53.518,63.192 ccw(c54.109,63.192) 53.691,62.774 cw(c54.109,63.192) 53.518,63.192
TD_P: IC2.17 R44.2 U4.3 U6.1 | length 27.8
  Top Layer w0.178: U4.3@50.929,62.651 51.306,62.651 52.032,61.925 52.032,60.006 52.653,59.385 57.328,59.385 57.917,58.796 IC2.17@57.917,57.14 ; U4.3@51.26,62.662 ccw(c51.727,62.815) 51.6,62.341 ; U4.3@51.229,62.44 cw(c51.229,61.745) 51.721,62.237 ccw(c51.229,61.745) U4.3@51.229,62.44 ; U4.3@51.44,62.651 ccw(c51.763,62.651) 51.535,62.423 cw(c51.763,62.651) U4.3@51.44,62.651
  Top Layer w0.254: U4.3@50.929,62.651 50.978,62.701 U6.1@50.978,65.151 51.003,65.176 v3(51.003,69.088) ; 50.978,63.892 cw(c51.637,63.892) 51.171,64.358 ccw(c51.637,63.892) 50.978,63.892 ; 50.978,63.892 ccw(c50.319,63.892) 50.785,64.358 cw(c50.319,63.892) 50.978,63.892 ; 51.003,68.321 cw(c51.77,68.321) 51.228,68.863 ccw(c51.77,68.321) 51.003,68.321 ; 51.003,68.321 ccw(c50.237,68.321) 50.779,68.863 cw(c50.237,68.321) 51.003,68.321 ; U6.1@50.785,65.944 ccw(c50.257,66.471) 51.003,66.471 cw(c50.257,66.471) U6.1@50.785,65.944 ; U4.3@50.806,62.774 ccw(c50.392,63.188) 50.978,63.188 cw(c50.392,63.188) U4.3@50.806,62.774 ; U4.3@50.978,62.95 ccw(c51.228,62.95) 51.051,62.774 cw(c51.228,62.95) U4.3@50.978,62.95 ; 51.003,66.349 ccw(c51.576,66.349) 51.171,65.944 cw(c51.576,66.349) 51.003,66.349
TM1CH3: U1.102
TM3CH4: U1.47
TX_N: U5.4 U6.14 | length 8.6
  Top Layer w0.254: U6.14@53.518,75.323 53.518,76.581 ; U5.4@54.305,79.477 54.305,77.368 53.518,76.581 ; 53.518,76.581 cw(c52.862,76.581) 53.325,76.117 ccw(c52.862,76.581) 53.518,76.581 ; 53.518,76.581 ccw(c54.174,76.581) 53.711,76.117 cw(c54.174,76.581) 53.518,76.581 ; 54.305,78.018 cw(c54.964,78.018) 54.498,78.484 ccw(c54.964,78.018) 54.305,78.018 ; 54.305,78.018 ccw(c53.646,78.018) 54.112,78.484 cw(c53.646,78.018) 54.305,78.018
TX_P: U5.1 U6.16 | length 8.5
  Top Layer w0.254: U5.1@50.495,79.477 50.495,77.165 50.978,76.683 U6.16@50.978,75.323 ; 50.495,78.018 cw(c51.154,78.018) 50.688,78.484 ccw(c51.154,78.018) 50.495,78.018 ; 50.495,78.018 ccw(c49.836,78.018) 50.302,78.484 cw(c49.836,78.018) 50.495,78.018 ; 50.978,76.582 cw(c50.319,76.582) 50.785,76.116 ccw(c50.319,76.582) 50.978,76.582 ; 50.978,76.582 ccw(c51.637,76.582) 51.171,76.116 cw(c51.637,76.582) 50.978,76.582
U1RX: U1.137
U1TX: U1.136
U2RX: U1.122
U2TX: U1.119
UVP_CPU: J6.2 U1.53 | length 71.9
  Top Layer w0.254: U1.53@21.423,41.566 18.175,41.566 16.307,43.434 16.307,50.851 18.161,52.705 18.161,64.389 20.345,66.573 20.345,91.186 21.285,92.126 21.285,93.98 22.53,95.225 28.016,95.225 28.78,94.461 ; J6.2@28.349,93.449 ccw(c27.379,94.461) 28.78,94.461 ; J6.2@28.525,93.266 ccw(c27.95,93.865) 28.78,93.865 ccw(c29.61,93.865) J6.2@29.035,93.266 ; J6.2@28.78,93 28.78,94.461 ; J6.2@29.211,93.449 cw(c30.181,94.461) 28.78,94.461
V_SAMPLING_UDA1341TS: C23.2 C25.2 D13.K R37.2 | length 119.4
  Top Layer w0.254: 11.877,45.831 ccw(c11.992,45.402) v2(11.557,45.491) ; 11.897,45.811 cw(c11.468,45.926) v2(11.557,45.491) ; v1(18.694,67.234) 17.501,67.234 16.307,66.04 16.307,57.277 13.538,54.508 13.538,47.473 v2(11.557,45.491) ; v1(47.917,78.804) v1@47.917,79.02 ; 11.991,45.925 cw(c11.557,46.359) 11.557,45.745 ccw(c11.557,46.359) 11.991,45.925 ; 11.991,45.925 ccw(c12.424,45.491) 11.811,45.491 cw(c12.424,45.491) 11.991,45.925 ; 17.775,67.234 cw(c17.775,66.314) 18.425,66.964 ccw(c17.775,66.314) 17.775,67.234 ; 17.775,67.234 ccw(c17.775,68.154) 18.425,67.503 cw(c17.775,68.154) 17.775,67.234
  Top Layer w0.381: 47.492,79.206 ccw(c48.164,79.386) v1@47.892,78.745 ; C23.2@47.497,87.334 47.497,85.394 47.041,84.938 47.041,79.896 v1@47.917,79.02 ; 47.497,86.134 cw(c48.57,86.134) 47.811,86.893 ccw(c48.57,86.134) 47.497,86.134 ; 47.497,86.134 ccw(c46.424,86.134) 47.182,86.893 cw(c46.424,86.134) 47.497,86.134 ; 47.222,79.714 cw(c46.312,78.804) 47.599,78.804 ccw(c46.312,78.804) 47.222,79.714
  Top Layer w0.508: R37.2@45.106,87.334 C23.2@47.497,87.334 ; 46.026,87.334 cw(c46.026,88.254) 45.376,87.604 ccw(c46.026,88.254) 46.026,87.334 ; 46.026,87.334 ccw(c46.026,86.415) 45.376,87.065 cw(c46.026,86.415) 46.026,87.334 ; 46.577,87.334 cw(c46.577,86.415) 47.227,87.065 ccw(c46.577,86.415) 46.577,87.334 ; 46.577,87.334 ccw(c46.577,88.254) 47.227,87.604 cw(c46.577,88.254) 46.577,87.334
  Bottom Layer w0.254: v2(11.557,45.491) 11.557,38.1 v1(13.081,36.576) ; v1@12.7,36.576 ccw(c11.78,36.576) 12.431,37.226 ccw(c13.081,37.877) v1@13.081,36.957 ; v1@18.571,67.262 cw(c19.136,67.133) 18.986,67.693 ; v1@18.872,67.386 22.758,71.272 22.758,75.082 25.197,77.521 ; 28.804,77.521 25.197,77.521 ; D13.K@47.917,79.953 v1(47.917,78.804) ; 11.557,44.878 cw(c12.17,44.878) 11.737,45.312 ccw(c12.17,44.878) 11.557,44.878 ; 11.557,44.878 ccw(c10.944,44.878) 11.377,45.312 cw(c10.944,44.878) 11.557,44.878 ; 25.197,77.521 46.634,77.521 v1(47.917,78.804) ; 47.267,78.153 cw(c47.917,77.503) 47.917,78.423 ccw(c47.917,77.503) 47.267,78.153 ; 47.267,78.153 ccw(c46.616,78.804) 47.536,78.804 cw(c46.616,78.804) 47.267,78.153 ; v1(47.917,78.804) cw(c48.304,78.804) 48.18,79.17 ccw(c48.304,78.804) v1(47.917,78.804) ; v1(47.917,78.804) ccw(c47.53,78.804) 47.654,79.17 cw(c47.53,78.804) v1(47.917,78.804) ; D13.K@47.917,79.723 cw(c46.997,79.723) 47.648,79.073 ccw(c46.997,79.723) D13.K@47.917,79.723 ; D13.K@47.917,79.723 ccw(c48.837,79.723) 48.186,79.073 cw(c48.837,79.723) D13.K@47.917,79.723 ; v1@18.694,67.615 ccw(c18.694,68.596) 19.388,67.902 cw(c18.694,68.596) v1@18.694,67.615 ; v1@19.075,67.234 cw(c19.934,67.234) 19.327,67.841 ccw(c19.934,67.234) v1@19.075,67.234
VOL_DOWN: U1.60
VOL_UP: U1.64
pads on no net: IC2.1 IC2.5 IC2.6 IC2.8 IC2.9 IC2.10 IC2.11 IC2.12 IC2.25 IC2.33 IC2.38 IC2.42 IC2.45 IC2.46 R4.6 R17.4 R17.5 R26.8 Re1.2 Re1.3 Re1.4 Re1.7 T4.4 T5.4 U1.2 U1.3 U1.4 U1.5 U1.6 U1.7 U1.8 U1.9 U1.12 U1.15 U1.18 U1.19 U1.20 U1.21 U1.22 U1.26 U1.28 U1.29 U1.34 U1.42 U1.46 U1.65 U1.69 U1.70 U1.75 U1.77 U1.78 U1.79 U1.80 U1.81 U1.82 U1.85 U1.86 U1.87 U1.88 U1.89 U1.90 U1.91 U1.92 U1.93 U1.96 U1.97 U1.98 U1.101 U1.123 U1.124 U1.125 U1.127 U1.132 U1.135 U1.141 U1.142 U1.143 U2.4 U2.5 U4.4 U5.2 U5.3 U5.6 U5.7 U6.4 U6.5 U6.12 U6.13 U7.2 U7.3 U7.6 U7.7 U8.4 U11.6 U11.8 U11.22 Y1.1 Y2.1
copper on no net: | length 3.6
  Bottom Layer w0.635: 72.288,66.853 v5(73.482,66.853) ; 72.716,66.853 cw(c72.716,66.086) 73.258,66.628 ccw(c72.716,66.086) 72.716,66.853 ; 72.716,66.853 ccw(c72.716,67.619) 73.258,67.077 cw(c72.716,67.619) 72.716,66.853

## Polygon pours and split planes (outlines as drawn)
AGND1 on Top Layer "Top Layer-No Net" (hatched 90Degree grid 0.203 track 0.508, remove dead copper, pour order 2): 25.853,61.955 33.544,61.955 34.323,61.149 35.001,60.446 35.001,58.417 35.001,57.923 33.544,56.414 33.518,56.388 27.763,56.388 26.708,56.388 25.577,57.559 25.476,57.663 25.476,60.654 25.476,61.565 26.045,62.154
EARTH on GND (split plane): 85.49,85.442 85.375,85.464 85.242,85.473 80.889,85.473 78.59,87.772 78.59,95.225 78.581,95.357 78.555,95.488 78.555,95.49 85.49,95.49
AGND1 on GND (split plane): 76.588,95.488 76.562,95.357 76.553,95.225 76.553,87.351 76.562,87.218 76.588,87.087 76.631,86.961 76.69,86.842 76.764,86.731 76.852,86.631 79.747,83.735 79.847,83.647 79.958,83.573 80.078,83.514 80.204,83.472 80.334,83.446 80.467,83.437 85.242,83.437 85.375,83.446 85.49,83.468 85.49,23.853 67.412,23.853 67.292,23.844 67.175,23.816 67.11,23.789 67.065,23.77 66.962,23.707 66.871,23.629 62.477,19.235 62.399,19.144 62.336,19.041 62.323,19.009 62.29,18.931 62.262,18.814 62.253,18.694 62.253,14.337 57.702,9.786 57.624,9.695 57.561,9.593 57.548,9.56 57.515,9.482 57.487,9.365 57.478,9.246 57.478,2.374 55.924,0.82 55.846,0.729 55.783,0.626 55.737,0.516 55.736,0.51 6.533,0.51 5.793,1.251 5.793,2.718 5.786,2.792 5.773,2.836 5.779,3 5.771,3.218 5.745,3.435 5.702,3.649 5.643,3.859 5.568,4.064 5.476,4.262 5.37,4.452 5.248,4.634 5.113,4.805 4.965,4.965 4.805,5.113 4.634,5.248 4.452,5.37 4.262,5.476 4.064,5.568 3.859,5.643 3.649,5.702 3.435,5.745 3.4,5.749 3.372,5.764 3.3,5.786 3.226,5.793 1.657,5.793 0.51,6.94 0.51,89.467 1.251,90.207 2.718,90.207 2.792,90.214 2.836,90.227 3,90.221 3.218,90.229 3.435,90.255 3.649,90.298 3.859,90.357 4.064,90.432 4.262,90.524 4.452,90.63 4.634,90.752 4.805,90.887 4.965,91.035 5.113,91.195 5.248,91.366 5.37,91.548 5.476,91.738 5.568,91.936 5.643,92.141 5.702,92.351 5.745,92.565 5.749,92.6 5.764,92.628 5.786,92.7 5.793,92.774 5.793,94.343 6.94,95.49 76.589,95.49
AC2+3.3V on VDD (split plane): 64.997,60.446 64.997,59.366 63.89,58.259 63.842,58.201 63.807,58.135 63.785,58.063 63.778,57.988 63.778,53.321 63.214,52.758 54.87,52.758 53.875,53.753 53.875,58.846 55.531,60.501 64.942,60.501
DC+3.3V on VDD (split plane): 50.587,8.739 50.454,8.739 50.521,8.806
DC+3.3V on VDD (split plane): 46.787,15.799 46.642,15.799 46.787,15.943
NetJ6_9 on VDD (split plane): 58.748,0.51 58.71,0.51 58.748,0.548
DC+5V on VDD (split plane): 50.722,25.851 50.722,23.444 50.722,19.717 48.406,17.401 46.482,17.401 46.407,17.393 46.335,17.372 46.269,17.336 46.211,17.289 44.992,16.07 44.944,16.011 44.909,15.945 44.887,15.873 44.88,15.799 44.88,10.135 44.88,8.82 43.58,7.52 40.259,7.52 40.184,7.513 40.112,7.491 40.046,7.456 39.988,7.408 38.072,5.492 38.04,5.475 37.982,5.427 36.875,4.32 25.965,4.32 24.462,5.823 24.462,11.271 26.219,13.028 37.998,13.028 38.073,13.036 38.145,13.057 38.211,13.093 38.269,13.14 45.573,20.445 45.587,20.449 45.653,20.484 45.711,20.532 45.759,20.59 45.794,20.656 45.816,20.728 45.823,20.803 45.823,24.994 45.823,25.673 46.666,26.516 50.057,26.516
DC+3.3V on VDD (split plane): 185 vertices, not listed, extent 0.51,4.32 85.49,95.49